# Altium PCB holiday_detector.PcbDoc
Units mil, origin at the board's own origin, x right, y up, seen from the top; angles counter-clockwise.
Board outline 4850 x 2500 mil, 2 copper layers (Top Layer, Bottom Layer); 16 components, 12 nets, 54 pads, 0 vias.
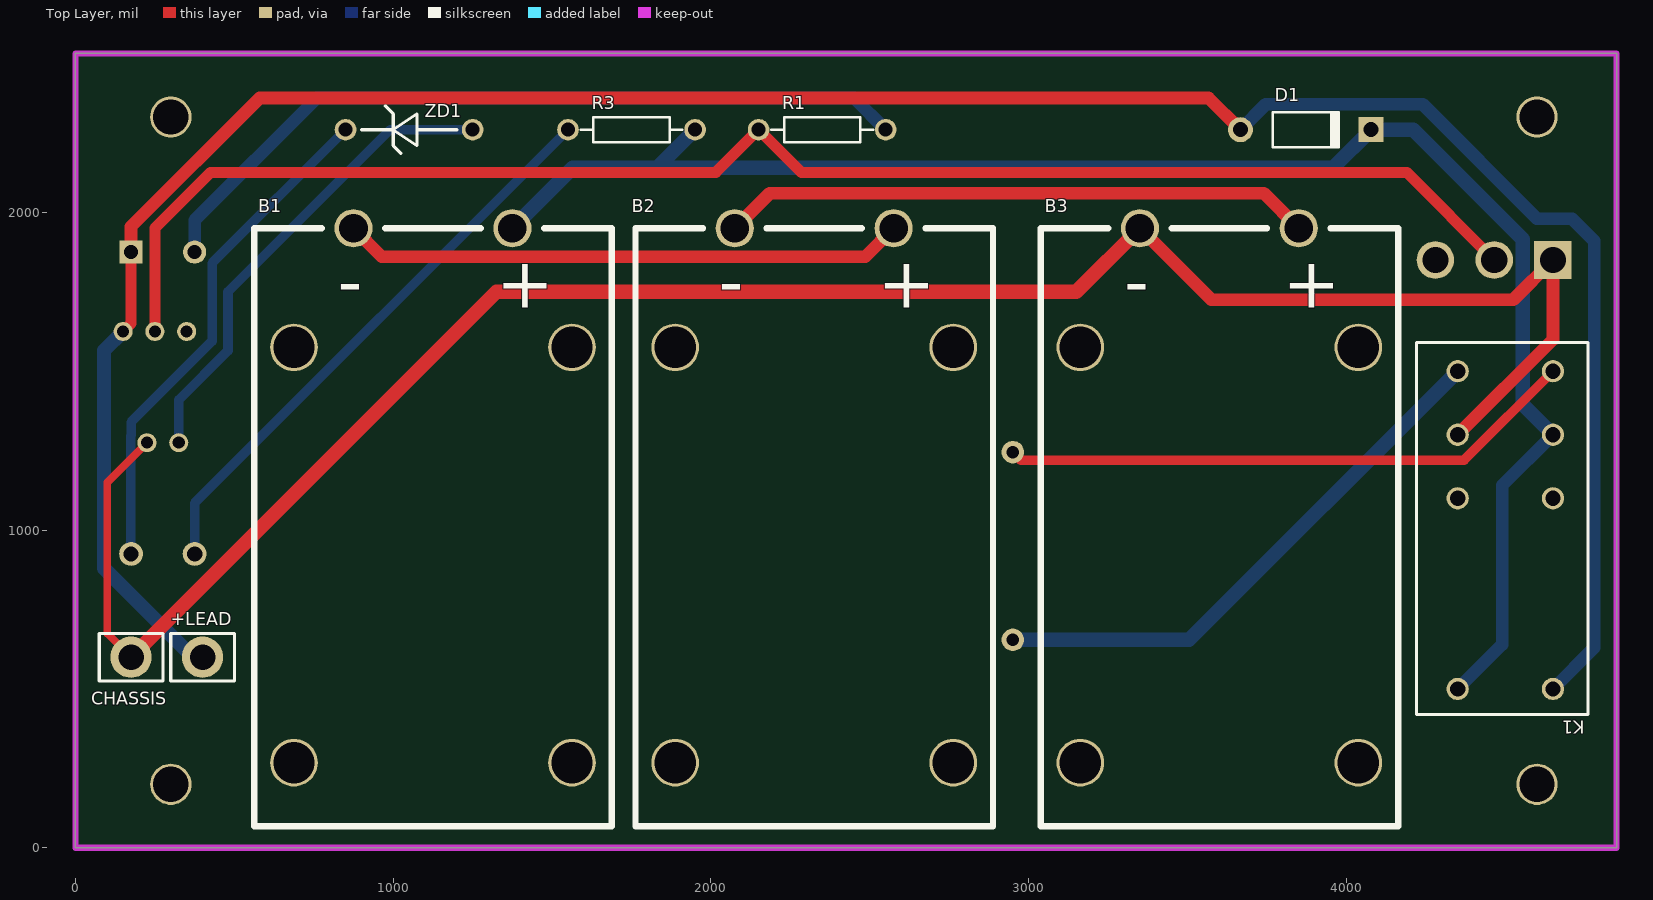
[diagram p0: Top Layer view]
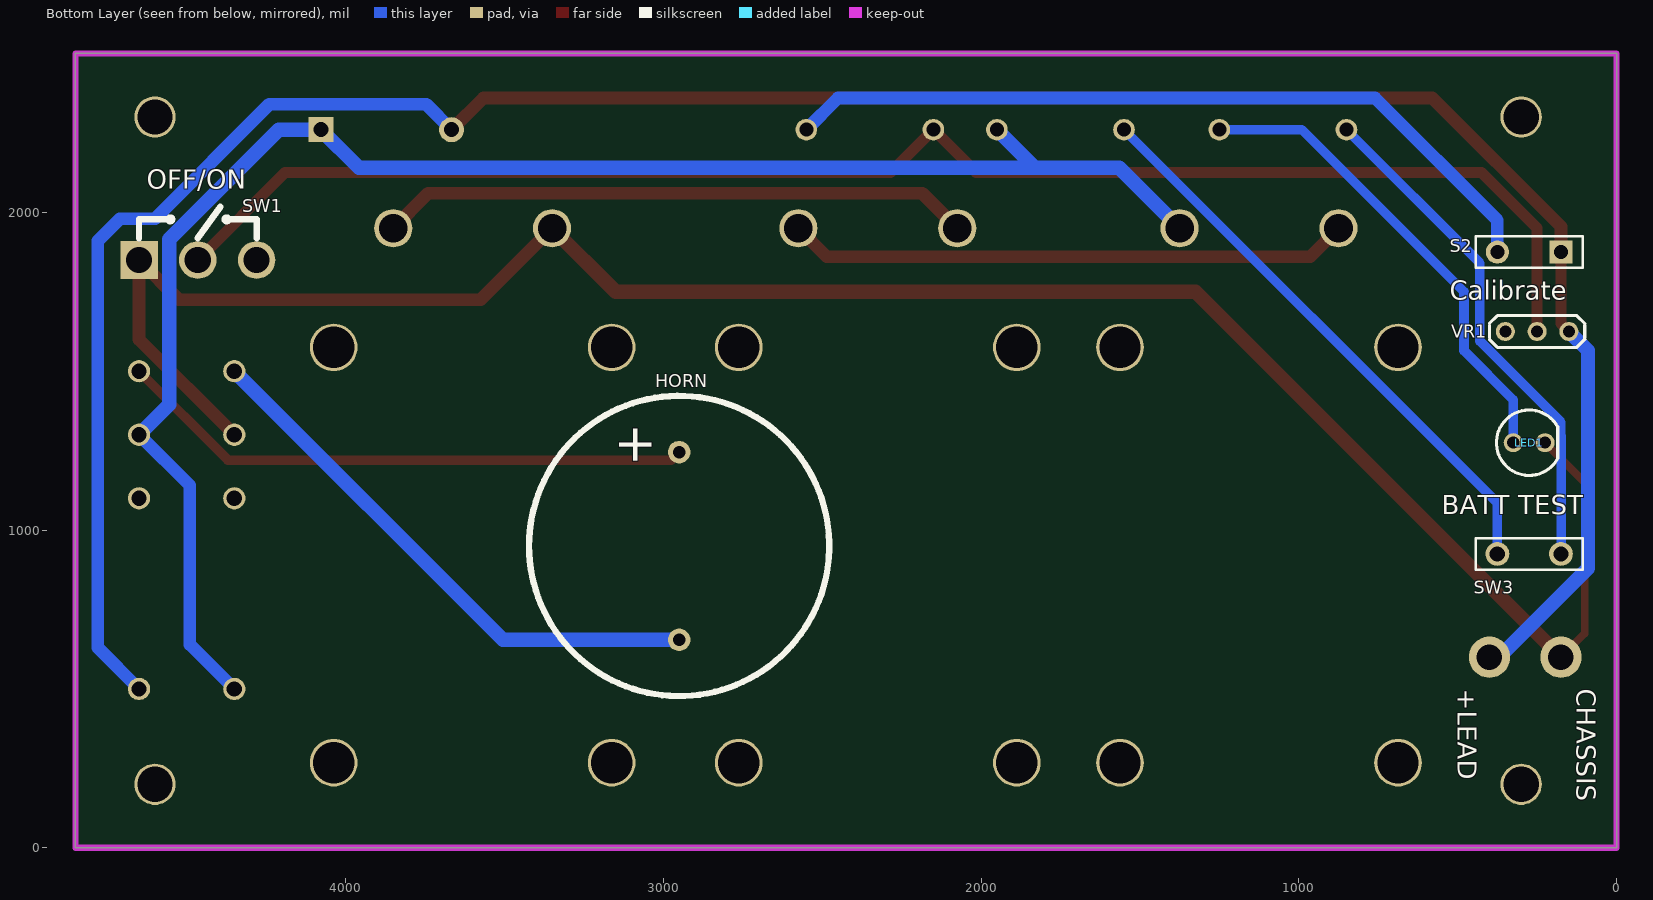
[diagram p1: Bottom Layer view, seen from below]

## Layer stack, top to bottom
Top Solder: solder mask 0.4, Solder Resist, Dk 3.5
Top Layer: signal copper 1.4
Dielectric 1: dielectric 12.6, FR-4, Dk 4.8
Bottom Layer: signal copper 1.4
Bottom Solder: solder mask 0.4, Solder Resist, Dk 3.5

## Board outline
0,0 0,2500 4850,2500 4850,0

## Design rules (kind name [scope] priority, off if disabled: settings)
Clearance [All] p1: gap=6
ComponentClearance [All] p1 off: gap=10 collisioncheckmode=3 verticalgap=10 showdistances=FALSE
Height [All] p1 off: minheight=0 maxheight=1000 prefheight=500
HoleSize [All] p1: absolutevalues=TRUE maxlimit=200 minlimit=1 maxpercent=80.000 minpercent=20.000
MinimumAnnularRing MinimumAnnularRing_via [IsVia] p1: minimumring=5
MinimumAnnularRing [All] p2: minimumring=7
MinimumSolderMaskSliver SilkscreenOverComponentPads [All] p2 off: minsoldermaskwidth=10
PolygonConnect [All] p1: connectstyle=Relief reliefconductorwidth=10 reliefentries=4 polygonreliefangle="90 Angle" airgapwidth=10
RoutingVias [All] p1: holewidth=20 width=32 viastyle="Through Hole" minholewidth=15 minwidth=26 maxholewidth=28 maxwidth=50
SilkToBoardRegionClearance [All] p1 off:
SilkToSilkClearance [All] p1 off: silktosilkclearance=10
SilkToSolderMaskClearance [IsPad] p1 off: minsilkscreentomaskgap=10 clearancetoexposedcopper=TRUE
SolderMaskExpansion [All] p1: expansion=4
Width [All] p1: maxlimit=200 minlimit=6 preferedwidth=12
23 further rules are at their usual default settings.

## Components (designator, comment, footprint, x,y, rotation, side; value= is the part's Value field where it differs from the comment)
+LEAD "TP_80_MIL" TP_80_MIL 400,600 r270 top
B1 "9V CLIP" BATT_CLIP 1375,1950 r0 top locked
B2 "9V CLIP" BATT_CLIP 2575,1950 r0 top locked
B3 "9V CLIP" BATT_CLIP 3850,1950 r0 top locked
CHASSIS "TP_80_MIL" TP_80_MIL 175,600 r90 top
D1 "1N4001" DO-41 3871.99,2260 r0 top
HORN "Speaker" BUZZER 2950,950 r270 bottom
K1 "DPDT" OM_G2R 4650,500 r90 top
LED1 "BATT TEST" LED_2 325,1275 r180 bottom
R1 "Res2" AXIAL-0.4 2350,2260 r180 top
R3 "Res2" AXIAL-0.4 1750,2260 r0 top
S2 "ADJUST" SPST-2#1 275,1875 r0 bottom
SW1 "OFF/ON" "SPDT_PCB - duplicate" 4650,1850 r180 bottom (schematic designator S1)
SW3 "BATT TEST" SPST-2#2 275,925 r180 bottom (schematic designator S3)
VR1 "Calibrate" JMP3 150,1625 r0 bottom
ZD1 "*" ZENER_1_WATT 1250,2260 r180 top

## Footprints (in the part's own frame and the unit in brackets; to place one, negate y for a bottom-side part, rotate by r counter-clockwise, add the part's x,y. Pads: shape width x height; smd on the part's side, far side on the other; paste and mask are expansions set on the pad)
AXIAL-0.4 [mil] "Axial Device, Thru-Hole; 2 Leads; 0.4 in Pin Spacing"
  round 68 hole 44: 1(-200,0) 2(200,0)
  silkscreen extent -160,-40 160,40
BATT_CLIP [mil]
  round 150 hole 130: 0(-687.5,-1682) 0(-687.5,-375) 0(187.5,-1682) 0(187.5,-375)
  round 120 hole 90: 1(0,0) 2(-500,0)
  silkscreen extent -812,-1882 312,0
BUZZER [mm]
  round 1.8 hole 1: 1(-7.5,0) 2(7.5,0)
  silkscreen extent -12,-12 12,12
DO-41 [mm] "Diode, Axial; Body 5.2 x 2.7 mm (LxDia. max), Lead Dia. 0.86 mm (max)"
  round 2 hole 1.2: 1(-5.23,0)
  rect 2x2 hole 1.2: 2(5.23,0)
  silkscreen extent -2.65,-1.41 2.75,1.4
JMP3 [mil]
  round 60 hole 38: 1(0,0) 2(100,0) 3(200,0)
  silkscreen extent -50,-50 250,50
LED_2 [mil]
  round 60 hole 38: 1(0,0) 2(100,0)
  silkscreen extent -53,-103 140,103, body extent -67,-117 154,117, height 348
OM_G2R [mil]
  round 70 hole 48: 1(0,0) 2(600,0) 3(800,0) 4(1000,0) 5(1000,300) 6(800,300) 7(600,300) 8(0,300)
  silkscreen extent -80,-110 1090,430
"SPDT_PCB - duplicate" [mm]
  rect 3x3 hole 2.1: 1(0,0)
  round 3 hole 2.1: 2(4.7,0) 3(9.4,0)
  silkscreen extent 0,1.75 9.4,4.25, body extent -1.59,-3.43 11.13,3.43, height 3.69
SPST-2#1 [mm] "Switch; 2 Leads"
  rect 1.85x1.85 hole 1.1: 1(-2.54,0)
  round 1.85 hole 1.1: 2(2.54,0)
  silkscreen extent -4.28,-1.27 4.28,1.27
SPST-2#2 [mm] "Switch; 2 Leads"
  round 1.905 hole 1.219: 1(-2.54,0) 2(2.54,0)
  silkscreen extent -4.28,-1.27 4.28,1.27
TP_80_MIL [mil]
  round 130 hole 80: 1(0,0)
  silkscreen extent -75,-100 75,100
ZENER_1_WATT [mil]
  round 68 hole 44: 1(0,0) 2(400,0)
  silkscreen extent 50,-75 350,75

## Part data
B1 B2 B3: library part BATT_CLIP, "PCB MOUNT 9V BATTERY CLIP"
D1: library part "Diode 1N4001", "1 Amp General Purpose Rectifier"
HORN: "Loudspeaker"
K1: library part Relay-DPDT, "Dual-Pole Dual-Throw Relay"
LED1: library part LED1, "Typical RED GaAs LED"
R1 R3: "Resistor"
S2 SW3: library part SW-PB, "TACTILE SW"
SW1: library part SW-SPST, "SPST SLIDE SW"
VR1: library part RPot, "Potentiometer"
ZD1: library part "D Zener", "Zener Diode"

## Free pads (board coordinates)
  round 130 hole 111: 0(300,200) 0(300,2300) 0(4600,2300) 2(4600,200)

## Nets (pads, with @x,y where several pads share a name; then routed paths per layer and width w, separated by ;. In a path a pad name is that pad's centre, name@x,y a point inside that pad or via, vN(x,y) a via of type N, cw(c..) or ccw(c..) an arc to the next point about the centre after c; other vN are vias at no path point)
27V: B1.1 D1.2 K1.3 K1.8 R3.2 | length 5199.6
  Bottom Layer w40: K1.8 4490,640 4490,1140 K1.3
  Bottom Layer w45: B1.1 1565,2140 1830,2140 ; R3.2 1830,2140 ; K1.3 4555,1395 4555,1915 4210,2260 D1.2 3957.89,2140 1830,2140
GND: B3.2 CHASSIS.1 K1.6 LED1.2 SW1.1 | length 6611.3
  Top Layer w25: CHASSIS.1 100,675 100,1150 LED1.2
  Top Layer w40: B3.2 3575,1725 4525,1725 SW1.1 4650,1600 K1.6
  Top Layer w45: CHASSIS.1 1325,1750 3150,1750 B3.2
Net+LEAD_1: +LEAD.1 D1.1 K1.1 S2.1 VR1.1 | length 8025.5
  Top Layer w35: VR1.1 175,1650 S2.1
  Top Layer w40: S2.1 175,1955 580,2360 3566.08,2360 D1.1
  Bottom Layer w40: D1.1 3746.08,2340 4240,2340 4600,1980 4710,1980 4780,1910 4780,630 K1.1
  Bottom Layer w45: VR1.1 90,1565 90,880 370,600 +LEAD.1
NetB1_2: B1.2 B2.1 | length 1774.6
  Top Layer w40: B1.2 965,1860 2485,1860 B2.1
NetB2_2: B2.2 B3.1 | length 1866.1
  Top Layer w40: B2.2 2185,2060 3740,2060 B3.1
NetHORN_1: HORN.1 K1.4 | length 1826.4
  Top Layer w30: HORN.1 2975.28,1220 4370,1220 K1.4
NetHORN_2: HORN.2 K1.5 | length 1750.1
  Bottom Layer w45: HORN.2 3504.72,654.72 K1.5
NetLED1_1: LED1.1 ZD1.1 | length 1520.5
  Bottom Layer w30: LED1.1 325,1410 480,1565 480,1750 990,2260 ZD1.1
NetR1_1: R1.1 S2.2 | length 2475.9
  Bottom Layer w40: S2.2 375,1975 760,2360 2450,2360 R1.1
NetR3_1: R3.1 SW3.1 | length 1821.7
  Bottom Layer w30: SW3.1 375,1085 R3.1
NetS3_2: SW3.2 ZD1.2 | length 1615.4
  Bottom Layer w30: SW3.2 174,926 174,1297.12 175,1298.12 175,1340 430,1595 430,1840 ZD1.2
SW_GND: R1.2 SW1.2 VR1.2 | length 4838.2
  Top Layer w35: VR1.2 250,1950 425,2125 2015,2125 R1.2 2285,2125 4189.96,2125 SW1.2
pads on no net: B1.0 B2.0 B3.0 K1.2 K1.7 SW1.3 VR1.3

## Keep-outs
Keep-Out Layer:
  the board outline again, w20

## Silkscreen, mask and mechanical layers (free items; w line width, h text height)
Bottom Overlay:
  text "CHASSIS" at 125,500 h60 r90
  text "+LEAD" at 500,500 h60 r90
Drill Drawing:
  circle w1: c5427.36,676.77 r17.81
  circle w1: c5427.36,142.57 r10.68
  circle w1: c5427.36,142.57 r17.81
  lines w1: 5409.56,240.5 5418.46,240.5 5427.36,231.6 5436.27,240.5 5445.17,240.5 5436.27,249.41 5445.17,258.31 5436.27,258.31 5427.36,267.21 5418.46,258.31 5409.56,258.31 5418.46,249.41 5409.56,240.5 ; 5409.56,356.25 5427.36,338.44 5445.17,356.25 5427.36,374.05 5409.56,356.25 ; 5409.56,445.28 5445.17,445.28 5445.17,480.89 5409.56,480.89 5409.56,445.28 ; 5409.56,587.73 5445.17,587.73 5427.36,552.12 5409.56,587.73 ; 5409.56,765.8 5445.17,765.8 5445.17,801.41 5409.56,801.41 5409.56,765.8 ; 5409.56,872.64 5427.36,881.54 5445.17,872.64 5436.27,890.45 5445.17,908.25 5427.36,899.35 5409.56,908.25 5418.46,890.45 5409.56,872.64 ; 5409.56,979.48 5409.56,988.38 5418.46,997.29 5409.56,1006.19 5409.56,1015.09 5418.46,1015.09 5427.36,1006.19 5436.27,1015.09 5445.17,1015.09 5445.17,1006.19 5436.27,997.29 5445.17,988.38 5445.17,979.48 5436.27,979.48 5427.36,988.38 5418.46,979.48 5409.56,979.48 ; 5409.56,1095.22 5418.46,1095.22 5418.46,1086.32 5436.27,1086.32 5436.27,1095.22 5445.17,1095.22 5445.17,1113.03 5436.27,1113.03 5436.27,1121.93 5418.46,1121.93 5418.46,1113.03 5409.56,1113.03 5409.56,1095.22 ; 5409.56,1202.06 5418.46,1202.06 5427.36,1193.16 5436.27,1202.06 5445.17,1202.06 5436.27,1210.97 5445.17,1219.87 5436.27,1219.87 5427.36,1228.77 5418.46,1219.87 5409.56,1219.87 5418.46,1210.97 5409.56,1202.06 ; 5416.68,244.06 5422.02,244.06 5427.36,238.72 5432.7,244.06 5438.05,244.06 5432.7,249.41 5438.05,254.75 5432.7,254.75 5427.36,260.09 5422.02,254.75 5416.68,254.75 5422.02,249.41 5416.68,244.06 ; 5416.68,580.61 5438.05,580.61 5427.36,559.24 5416.68,580.61 ; 5416.68,772.92 5438.05,772.92 5438.05,794.29 5416.68,794.29 5416.68,772.92 ; 5416.68,879.76 5427.36,885.1 5438.05,879.76 5432.7,890.45 5438.05,901.13 5427.36,895.79 5416.68,901.13 5422.02,890.45 5416.68,879.76
  lines w15: 5360.13,92.71 8169.03,92.71 ; 5360.13,1267.95 8169.03,1267.95 ; 5761.71,-14.13 5761.71,1374.79 ; 6267.95,-14.13 6267.95,1374.79 ; 7235.58,-14.13 7235.58,1374.79 ; 7605.11,-14.13 7605.11,1374.79 ; 5360.13,-14.13 8169.03,-14.13 8169.03,1374.79 5360.13,1374.79 5360.13,-14.13
  lines w20: 0,0 0,2500 4850,2500 4850,0 0,0
  text "Symbol" at 5424.24,1300 h51.28
  text "Hit Count" at 5793.76,1300 h51.28
  text "Finished Hole Size" at 6300,1300 h51.28
  text "Plated" at 7267.64,1300 h51.28
  text "Hole Type" at 7637.16,1300 h51.28
  text "2" at 5793.76,1193.16 h42.74
  text "39.37mil (1.000mm)" at 6300,1193.16 h42.74
  text "PTH" at 7267.64,1193.16 h42.74
  text "Round" at 7637.16,1193.16 h42.74
  text "2" at 5793.76,1086.32 h42.74
  text "43.31mil (1.100mm)" at 6300,1086.32 h42.74
  text "PTH" at 7267.64,1086.32 h42.74
  text "Round" at 7637.16,1086.32 h42.74
  text "2" at 5793.76,979.48 h42.74
  text "47.24mil (1.200mm)" at 6300,979.48 h42.74
  text "PTH" at 7267.64,979.48 h42.74
  text "Round" at 7637.16,979.48 h42.74
  text "2" at 5793.76,872.64 h42.74
  text "80.00mil (2.032mm)" at 6300,872.64 h42.74
  text "PTH" at 7267.64,872.64 h42.74
  text "Round" at 7637.16,872.64 h42.74
  text "3" at 5793.76,765.8 h42.74
  text "82.68mil (2.100mm)" at 6300,765.8 h42.74
  text "PTH" at 7267.64,765.8 h42.74
  text "Round" at 7637.16,765.8 h42.74
  text "4" at 5793.76,658.96 h42.74
  text "111.00mil (2.819mm)" at 6300,658.96 h42.74
  text "PTH" at 7267.64,658.96 h42.74
  text "Round" at 7637.16,658.96 h42.74
  text "5" at 5793.76,552.12 h42.74
  text "38.00mil (0.965mm)" at 6300,552.12 h42.74
  text "PTH" at 7267.64,552.12 h42.74
  text "Round" at 7637.16,552.12 h42.74
  text "6" at 5793.76,445.28 h42.74
  text "44.00mil (1.118mm)" at 6300,445.28 h42.74
  text "PTH" at 7267.64,445.28 h42.74
  text "Round" at 7637.16,445.28 h42.74
  text "6" at 5793.76,338.44 h42.74
  text "90.00mil (2.286mm)" at 6300,338.44 h42.74
  text "PTH" at 7267.64,338.44 h42.74
  text "Round" at 7637.16,338.44 h42.74
  text "10" at 5793.76,231.6 h42.74
  text "48.00mil (1.219mm)" at 6300,231.6 h42.74
  text "PTH" at 7267.64,231.6 h42.74
  text "Round" at 7637.16,231.6 h42.74
  text "12" at 5793.76,124.76 h42.74
  text "130.00mil (3.302mm)" at 6300,124.76 h42.74
  text "PTH" at 7267.64,124.76 h42.74
  text "Round" at 7637.16,124.76 h42.74
  text "54 Total" at 5793.76,17.92 h42.74

## Dimensions
0,0 to 4850,0 on Drill Drawing
0,0 to 0,2500 on Drill Drawing

## Text inside footprints (layer, text, board x,y; h text height)
B1: Top Overlay "+" at 1325,1700 h158; Top Overlay "-" at 825,1706.32 h158
B2: Top Overlay "-" at 2025,1706.32 h158; Top Overlay "+" at 2525,1700 h158
B3: Top Overlay "+" at 3800,1700 h158; Top Overlay "-" at 3300,1706.32 h158
HORN: Bottom Overlay "+" at 3138.98,1335.83 h118.11 r90